# EAGLE board SIM900-328 (EAGLE 6.5.0)
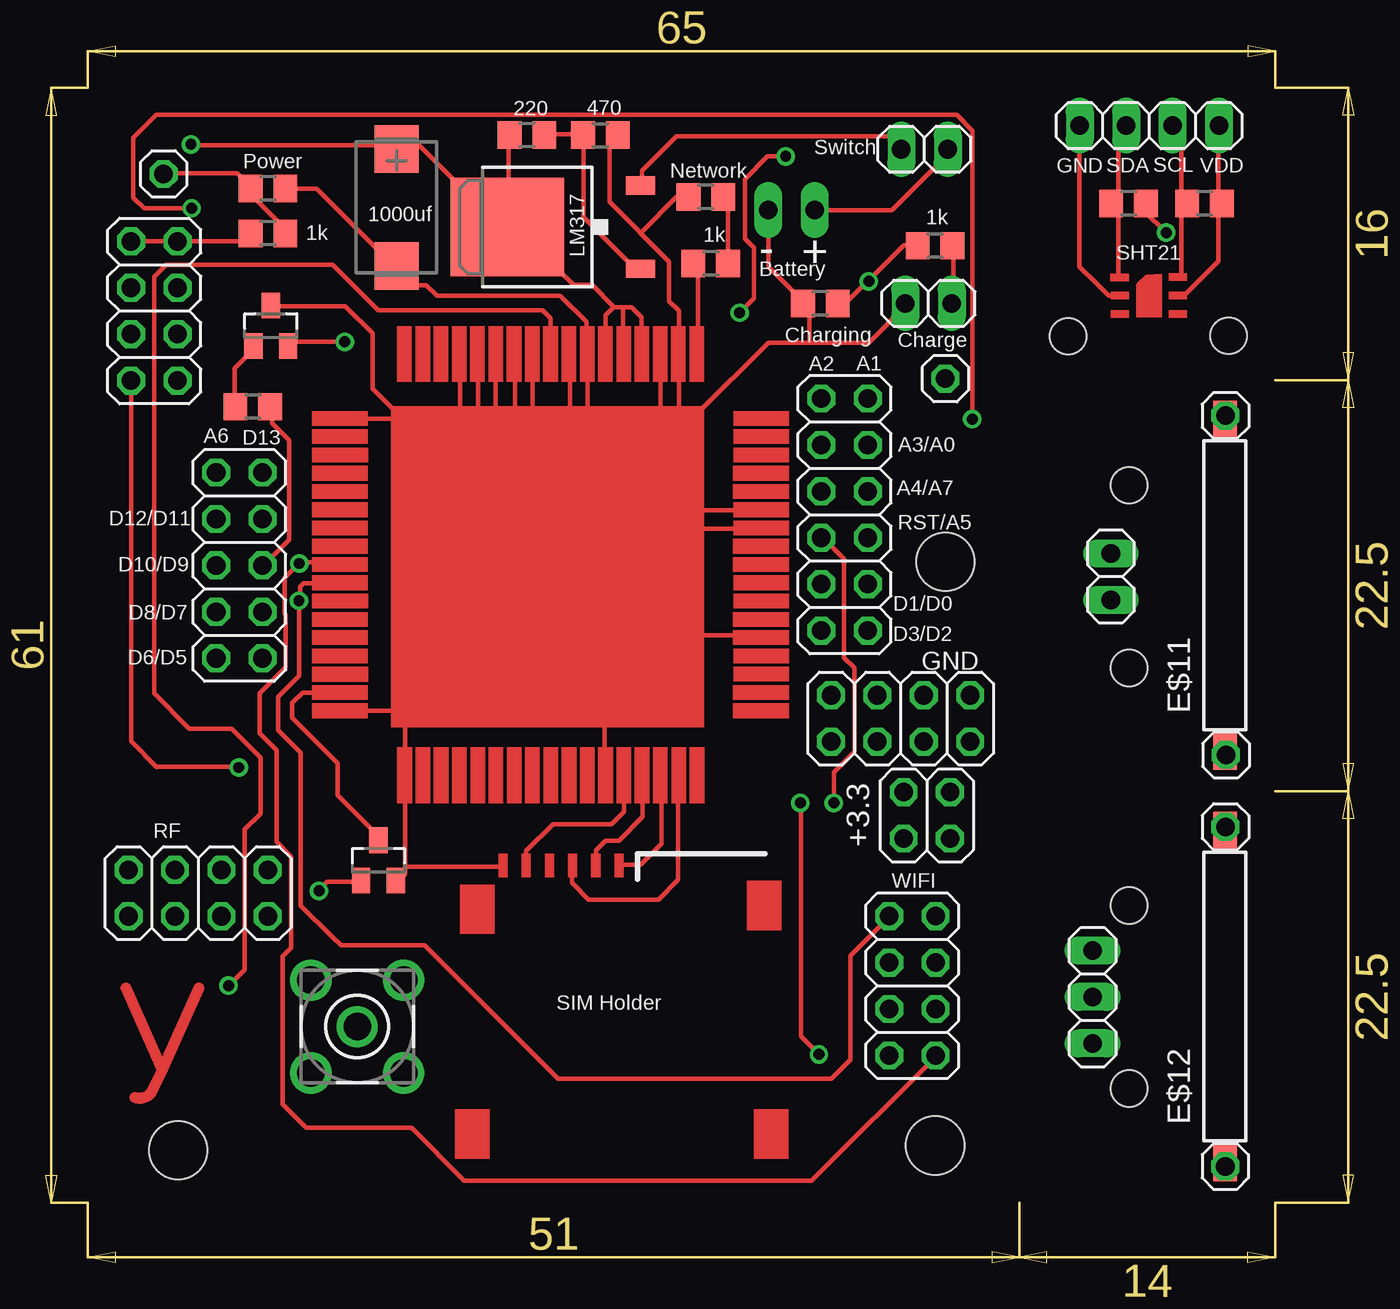
[diagram p0: board, top side]
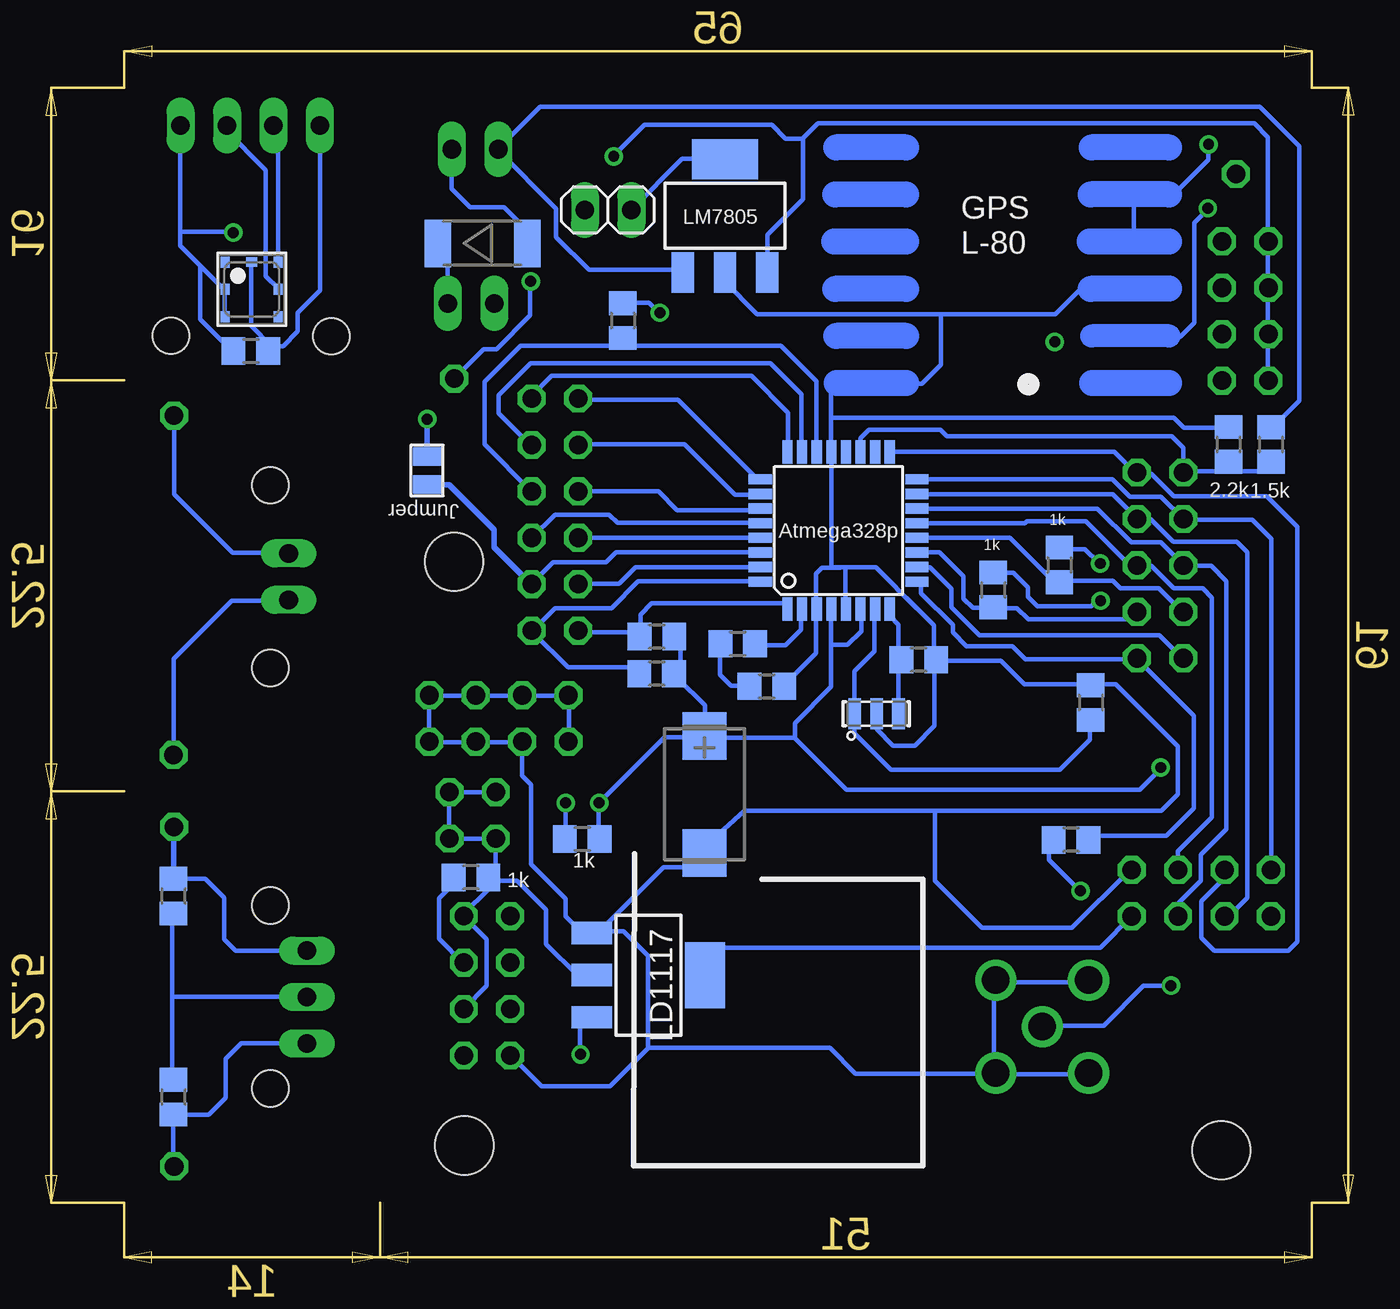
[diagram p1: board, bottom side, seen from below]

Size 71.6 x 66.6 mm. Coordinates in mm from the lower left corner, seen from the top.
Copper layers (1*16): Top 0.035mm / dielectric 1.5mm / Bottom 0.035mm
Design rules "default": minimum track width 10mil, minimum drill 24mil, track to track 8mil, track to pad 8mil, pad to pad 8mil, via to via 8mil, smd to smd 8mil, copper to edge 40mil, drill to drill 8mil, minimum pad ring 10mil, minimum via ring 8mil, stop-mask expansion 4mil, vias tented up to drill 0mil, thermal gap 10mil
Holes 3.2 mm at 7.25,6.16 49.25,38.36 48.69,6.43
Holes 2 mm at 55.97,50.7 64.75,50.73 59.3,42.55 59.3,32.55 59.3,19.55 59.3,9.55

## Footprints (pad centres in the part's own frame; a part is rotated, then mirrored left to right if it is on the bottom)
2X02 = drill 1.016 octagon: 1 -1.27,-1.27; 2 -1.27,1.27; 3 1.27,-1.27; 4 1.27,1.27
TQFP32-08 = smd 1.27 x 0.559: 1 -4.293,2.8; 2 -4.293,2; 3 -4.293,1.2; 4 -4.293,0.4; 5 -4.293,-0.4; 6 -4.293,-1.2; 7 -4.293,-2; 8 -4.293,-2.8; 17 4.293,-2.8; 18 4.293,-2; 19 4.293,-1.2; 20 4.293,-0.4; 21 4.293,0.4; 22 4.293,1.2; 23 4.293,2; 24 4.293,2.8 | smd 0.559 x 1.27: 9 -2.8,-4.293; 10 -2,-4.293; 11 -1.2,-4.293; 12 -0.4,-4.293; 13 0.4,-4.293; 14 1.2,-4.293; 15 2,-4.293; 16 2.8,-4.293; 25 2.8,4.293; 26 2,4.293; 27 1.2,4.293; 28 0.4,4.293; 29 -0.4,4.293; 30 -1.2,4.293; 31 -2,4.293; 32 -2.8,4.293
R0805 = smd 1.3 x 1.5: 1 -0.95,0; 2 0.95,0
1X02 = drill 1.016 long: 1 -1.27,0; 2 1.27,0
1X01 = drill 1.016 octagon: 1 0,0
CT7343 = smd 2.6 x 2.4: + -3.2,0; - 3.2,0
MELF-MLL41 = smd 1.45 x 2.6: 1 -2.445,0; 2 2.445,0
JUMP-2 = smd 1.016 x 1.524: 1 -0.762,0; 2 0.762,0
BMP180 = smd 0.6 x 0.5: 1 1.5,1.45; 2 0,1.45; 3 -1.5,1.45; 4 -1.5,-1.45; 5 0,-1.45; 6 1.5,-1.45 | smd 0.5 x 0.6: 7 1.5,0
2X04 = drill 1.016 octagon: 1 -3.81,-1.27; 2 -3.81,1.27; 3 -1.27,-1.27; 4 -1.27,1.27; 5 1.27,-1.27; 6 1.27,1.27; 7 3.81,-1.27; 8 3.81,1.27
X3-SMD-3.6X1.3X0.8MM = smd 0.7 x 1.7: 1 -1.2,0; 2 0,0; 3 1.2,0
SOT23 = smd 1 x 1.4: 1 -0.95,-1.1; 2 0.95,-1.1; 3 0,1.1
LTI-SASF54GT = drill 1.5 pad 2.2: 1 0,0; 2 -2.54,2.54; 3 2.54,2.54; 4 2.54,-2.54; 5 -2.54,-2.54
MK15 = smd 2 x 1.3: 1 -9.1,0; 2 9.1,0
1X03 = drill 1.016 long: 1 -2.54,0; 2 0,0; 3 2.54,0
1X04 = drill 1.016 long: 1 -3.81,0; 2 -1.27,0; 3 1.27,0; 4 3.81,0
2X05 = drill 1.016 octagon: 1 -5.08,-1.27; 2 -5.08,1.27; 3 -2.54,-1.27; 4 -2.54,1.27; 5 0,-1.27; 6 0,1.27; 7 2.54,-1.27; 8 2.54,1.27; 9 5.08,-1.27; 10 5.08,1.27
2X06 = drill 1.016 octagon: 1 -6.35,-1.27; 2 -6.35,1.27; 3 -3.81,-1.27; 4 -3.81,1.27; 5 -1.27,-1.27; 6 -1.27,1.27; 7 1.27,-1.27; 8 1.27,1.27; 9 3.81,-1.27; 10 3.81,1.27; 11 6.35,-1.27; 12 6.35,1.27
SOT223 = smd 1.219 x 2.235: 1 -2.311,-3.099; 2 0,-3.099; 3 2.311,-3.099 | smd 3.6 x 2.2: 4 0,3.099
TO252 = smd 1 x 1.6: 1 -2.28,-4.8; 2 2.28,-4.8 | smd 5.4 x 6.2: 3 0,2.5

## Placement (x,y rotation side)
+3.3  [2X02]  48.23,24.49 0 top
ATMEGA  [TQFP32-08]  28.2,40.07 90 bottom
CAP1  [R0805]  14.4,30.65 270 bottom
CAP2  [R0805]  63.42,57.97 180 top
CAP3  [R0805]  59.26,57.96 180 top
CAP4  [R0805]  23.82,33 180 bottom
CAP5  [R0805]  60.37,49.89 180 bottom
CAP7  [R0805]  64.6,20.07 90 bottom
CAP8  [R0805]  64.6,9.07 90 bottom
CHARGE  [1X02]  48.32,52.51 180 top
CHRGLED  [1X01]  49.24,48.39 0 top
E$1  [CT7343]  35.54,25.64 270 bottom
E$2  [CT7343]  19.2,57.75 270 top
E$3  [MELF-MLL41]  47.69,55.79 0 bottom
E$4  [JUMP-2]  50.73,43.36 90 bottom
E$5  [BMP180]  60.32,53.26 90 bottom
E$6  [2X04]  46.79,29.79 0 top
E$7  [X3-SMD-3.6X1.3X0.8MM]  26.12,30.04 0 bottom
E$8  [SOT23]  18.21,22.03 0 top
E$9  [SOT23]  12.32,51.28 0 top
E$10  [LTI-SASF54GT]  17.06,12.93 0 top
E$11  [MK15]  64.55,37.07 90 top
E$12  [MK15]  64.55,14.57 90 top
E$13  [1X03]  57.3,14.55 90 top
E$14  [1X04]  60.41,62.22 180 top
E$15  [2X04]  5.95,52.09 90 top
E$24  [R0805]  16.12,38.19 270 bottom
E$25  [R0805]  19.73,36.82 90 bottom
IO1  [2X05]  10.6,38.17 90 top
IO2  [2X06]  43.73,40.95 90 top
LD1117  [SOT223]  38.61,15.75 270 bottom
LED2  [R0805]  12.17,56.33 180 top
LED3  [R0805]  32.12,31.55 0 bottom
LED4  [R0805]  36.4,54.68 180 top
LED5  [R0805]  42.4,52.49 180 top
LED6  [R0805]  48.68,55.65 180 top
LM317  [TO252]  27.76,56.68 90 top
LM7805  [SOT223]  34.42,57.29 0 bottom
POWER  [1X02]  40.82,57.61 180 bottom
PWRLED  [1X01]  6.46,59.58 0 top
PWRLED1  [1X01]  64.57,46.36 0 top
PWRLED2  [1X01]  64.6,27.8 0 top
PWRLED3  [1X01]  64.57,23.86 0 top
PWRLED4  [1X01]  64.57,5.29 0 top
R1  [R0805]  40.01,51.56 270 bottom
R2  1k  [R0805]  12.17,58.78 180 top
R3  1k  [R0805]  48.32,21.1 180 bottom
R4  220  [R0805]  26.34,61.72 0 top
R5  470  [R0805]  30.37,61.71 0 top
R6  [R0805]  33.72,33.88 0 bottom
R7  [R0805]  42.24,23.19 180 bottom
R8  [R0805]  38.15,34.26 180 bottom
R9  [R0805]  38.16,32.24 180 bottom
R10  [R0805]  4.54,44.78 270 bottom
R11  [R0805]  6.86,44.78 270 bottom
R12  1k  [R0805]  36.14,58.32 180 top
R13  220  [R0805]  11.34,46.85 180 top
R15  [R0805]  15.48,23.15 180 bottom
RF  [2X04]  8.35,20.24 0 top
SWITCH1  [1X02]  58.3,37.55 270 top
SWITCH2  [1X02]  48.1,60.93 180 top
WIFI  [2X04]  47.44,15.16 90 top

## Library data of the parts
+3.3 CHARGE CHRGLED E$6 E$13-E$15 IO1 IO2 POWER PWRLED PWRLED1-PWRLED4 RF SWITCH1 SWITCH2 WIFI = pinhead
ATMEGA = Arduino-AVR
CAP1-CAP5 CAP7 CAP8 E$24 E$25 LED2-LED6 R1-R13 R15 = eagle-ltspice
E$1-E$3 LD1117 LM317 LM7805 = smd-ipc
E$4 = smd-special
E$5 = SparkFun-Sensors
E$7 = SMD-RESONATOR-16MHZ-15PF-0.5_-40R_3P-3.2X1.3MM_
E$8 E$9 = linear
E$10 = con-coax
E$11 E$12 = switch-reed

## Tracks (layer width: path | path; a pad name or v marks a point on that pad's centre or on a via)
S$1
  Top 0.254: 28.81,21.64 28.81,20.79 29.72,19.88 33.53,19.88 34.61,20.96 34.61,26.55
S$2
  Top 0.254: 33.7,25.89 33.7,22.94 32.56,21.8 31.41,21.8
S$3
  Top 0.254: 13.92,36.36 13.92,36.99 14.12,37.19 16.26,37.19
S$4
  Top 0.254: 13.95,27.91 13.95,19.55 15.67,17.84 16.17,17.39 18.89,17.37 20.74,17.37 28.03,10.08 43,10.08 44.05,11.12 44.05,16.8 46.15,18.9
S$5
  Bottom 0.254: 41.83,18.15 39.98,18.15 38.63,16.79 38.63,11.75 40.72,9.66 44.45,9.66 46.11,11.32
S$6
  Bottom 0.305: 35.63,15.37 35.63,16.32
S$7
  Bottom 0.254: 23.92,42.86 13.21,42.86 12.27,41.92 10.56,41.92 9.32,40.68
S$8
  Bottom 0.254: 26.99,44.44 26.99,45.13 26.54,45.59 22.64,45.59 22.28,45.23 9.96,45.23
S$9
  Bottom 0.254: 23.98,41.27 14.03,41.27 12.18,39.42 10.55,39.42 9.35,38.22
S$10
  Bottom 0.254: 11.86,40.72 13.19,42.06 23.98,42.06
S$11
  Bottom 0.254: 61.81,53.22 64.25,55.66 64.25,62.18
S$12
  Bottom 0.254: 10.5,27.09 11.72,25.88 27.76,25.88 30.61,28.73 35.68,28.73
S$13
  Bottom 0.254: 9.86,46.24 28.09,46.24
S$14
  Bottom 0.254: 25.42,44.37 13.11,44.37 11.93,43.19
S$15
  Bottom 0.254: 11.89,43.17 11.07,43.17 9.86,41.96 4.78,41.96 3.1,40.28 3.1,17.57 3.59,17.07 7.64,17.07 8.35,17.79 8.35,19.79 7.09,21.05 7.09,21.55 7.1,21.56
S$16
  Bottom 0.254: 9.35,40.66 5.54,40.66 4.51,39.63 4.51,21.44
S$17
  Bottom 0.254: 9.33,43.23 9.33,44.59 9.96,45.23
S$18
  Bottom 0.254: 41.79,18.28 42.51,18.28
S$19
  Bottom 0.254: 42.41,17.98 42.41,18.22 43.16,18.97 43.16,19.94 45.05,21.82 45.05,26.18 45.52,26.64 45.52,28.48 50.62,28.48 50.62,31.04 42.96,31.04 42.96,28.52
S$20
  Top 0.254: 42.52,39.7 43.71,38.52 43.71,33.12 44.27,32.56 44.27,27.96 43.15,26.84 43.15,25.17
S$21
  Bottom 0.254: 11.77,40.69 11.11,40.69 9.89,39.47 6.4,39.47 5.82,38.89 5.82,19.99 6.9,18.91
S$22
  Bottom 0.254: 11.9,38.13 11.08,38.13 9.86,36.91 8.27,36.91 7.76,36.4 7.76,24.39 9.63,22.52 9.63,21.48
S$23
  Bottom 0.254: 9.61,18.97 9.61,19.68 8.36,20.92 8.36,22.35 6.97,23.74 6.97,37.3 7.81,38.14 9.35,38.14
S$24
  Bottom 0.254: 24.84,32.9 24.84,32.36
S$25
  Bottom 0.254: 12.93,53.43 14.81,53.43 16.33,51.91
S$26
  Bottom 0.254: 14.96,20.35 16.68,22.07 16.68,23.09
S$27
  Top 0.254: 32.68,25.98 32.68,24.4 31.38,23.11 30.64,23.11 30.12,22.58 30.12,21.48
S$28
  Bottom 0.254: 48.72,16.38 50.07,17.73 50.07,19.96 49.27,20.76
S$29
  Bottom 0.254: 58.88,54.75 58.88,62.54
S$30
  Bottom 0.254: 42.41,34.49 39.17,34.49
S$31
  Bottom 0.254: 38.79,32.59 43.02,32.59 44.94,34.51
S$32
  Bottom 0.254: 36.86,34.37 36.86,32.43
S$33
  Top 0.254: 27.88,61.76 29.22,61.76
S$34
  Top 0.254: 35.6,46.35 35.6,46.4 39.55,50.35 39.94,50.35
S$35
  Top 0.254: 29.44,61.62 29.44,57.22 32.3,54.36
S$36
  Top 0.254: 34.13,54.78 30.86,58.05 30.86,61.71
S$37  (via drill 0.6)
  other vias: 7.95,61.2
S$38
  Bottom 0.254: 9.31,43.31 4.2,43.31
S$39
  Bottom 0.254: 5.45,62.35 8.64,62.35
S$40
  Bottom 0.254: 6.92,45.68 9.3,45.68 9.86,46.24
S$41
  Bottom 0.254: 32.09,54.26 32.09,56.26 30.16,58.2 30.16,61.53 29.34,62.35
S$42
  Bottom 0.254: 36.18,22.21 33.34,24.73 10.54,24.73 9.63,25.64 9.63,28.27 13.02,31.66 18.03,31.66
S$43
  Bottom 0.254: 12.29,21.47 15.43,18.33 20.37,18.33 22.93,20.9 22.93,24.68
S$44
  Bottom 0.254: 41.56,15.73 42.5,15.73 44.2,17.43 44.2,19.32 45.79,20.91 47.36,20.91 47.36,20.46 48.73,19.1
S$45
  Top 0.254: 35.69,49.36 35.69,54.75
S$46
  Top 0.254: 27.66,49.55 27.66,51.02
S$47
  Top 0.254: 37.34,54.72 37.34,58.44
S$48
  Top 0.254: 25.35,61.82 25.35,58.01
S$49
  Bottom 0.254: 22.88,32.95 19.33,32.95 18.03,31.66
S$50
  Top 0.254: 32.64,59.05 32.64,59.76 34.54,61.66 46.95,61.66
S$51
  Top 0.254: 42.04,57.59 46.31,57.59 49.53,60.81
S$52
  Top 0.254: 6.47,59.62 10.49,59.62 11.22,58.9
S$53
  Top 0.254: 6.09,27.13 4.68,28.54 4.68,48.12
S$54
  Top 0.254: 47.1,52.4 45.05,50.35 39.57,50.35
S$55
  Top 0.254: 49.68,52.44 49.68,55.48
S$56
  Bottom 0.254: 11.9,38.11 12.2,38.11 14.66,40.57 17.89,40.57 18,40.46 24.19,40.46
S$57
  Bottom 0.254: 7.95,61.19 7.95,60.36 10.07,58.24
S$58
  Top 0.254: 10.9,58.45 11.25,58.45 13.11,56.59
S$59
  Top 0.305: 18.73,54.39 19.79,54.39
S$60
  Top 0.254: 7.98,61.14 18.6,61.14
S$61
  Top 0.254: 13.85,38.26 13.07,37.48 13.07,35.53 13.14,35.46 13.14,32.6 11.71,31.17 11.71,28.97 12.64,28.05 12.64,23.04 13.45,22.23 13.45,17.25
S$62
  Top 0.254: 4.65,55.72 4.83,55.9 11.37,55.9
S$63
  Top 0.254: 27.64,50.3 27.64,51.69 27.21,52.12 18.21,52.12 15.71,54.63 6.59,54.63 5.93,53.97 5.93,31.16 7.87,29.23 10.18,29.23 11.76,27.65 11.76,24.58 10.9,23.72 10.9,16.05 10.03,15.17
S$64
  Top 0.254: 11.89,38.15 13.32,39.57 13.32,45.02 12.4,45.94 12.4,46.74
S$65
  Bottom 0.254: 4.72,48.15 4.72,55.78
S$66  (via drill 0.6)
  other vias: 16.37,50.39
S$67
  Bottom 0.254: 49.61,52.53 49.61,55.8
S$68
  Bottom 0.254: 14.54,15.35 19.69,15.35 19.69,10.34 14.58,10.34
S$69
  Bottom 0.254: 19.65,37.76 18.63,37.76 17.85,36.98 17.85,36.45 17.32,35.92 14.36,35.92 13.94,36.34
S$70
  Top 0.254: 50.73,46.14 50.73,61.95
S$71
  Top 0.254: 47.77,55.69 46.96,55.69 43.73,52.46
S$72
  Top 0.254: 41.79,52.22 41.79,50.37
S$73
  Top 0.254: 19.25,20.85 19.68,21.27 19.68,26.15
S$74
  Top 0.254: 25,21.69 19.73,21.69
S$75
  Bottom 0.254: 4.7,55.68 4.7,61.59 5.45,62.35
S$76
  Top 0.254: 31.64,25.84 31.64,24.69 30.97,24.01 27.76,24.01 26.29,22.54 26.29,21.54
S$77
  Top 0.254: 35.05,29.57 34.78,29.84
S$78  (via drill 0.6)
  other vias: 42.32,11.41
S$79
  Bottom 0.254: 46.96,23.18 46.96,20.63
S$80
  Bottom 0.254: 46.96,23.21 49.52,23.21 49.52,25.74 46.96,25.74
S$81  (via drill 0.6)
  other vias: 13.86,36.23
S$82
  Bottom 0.254: 11.82,35.58 12.19,35.21 17.81,35.21 18.43,35.83 19.82,35.83
S$83  (via drill 0.6)
  other vias: 10.57,27.11
S$84
  Bottom 0.254: 12.13,50.69 9.49,50.69 8.74,51.43 8.74,56.91 8.13,57.53
S$85  (via drill 0.6)
  other vias: 7.99,57.71
S$86
  Top 0.254: 7.41,62.81 6.05,62.81
S$87
  Top 0.254: 57.58,53.51 56.59,54.5 56.59,62.22
S$88
  Bottom 0.254: 28.6,35.8 28.61,35.79 28.61,31.51 30.6,29.52 30.6,28.72
S$89
  Bottom 0.254: 30.26,35.75 30.26,34.65 31.11,33.8 32.85,33.8
S$90
  Top 0.254: 13.12,58.78 14.82,58.78 19.21,54.4
S$91
  Bottom 0.254: 58.89,53.32 59.55,53.98 59.55,59.8 61.78,62.03
S$92  (via drill 0.6)
  other vias: 45.06,53.7
S$93
  Top 0.254: 35.24,58.35 34.56,58.35 32.58,56.37
S$94
  Top 0.254: 9.8,62.81 7.44,62.81
S$95
  Bottom 0.254: 39.54,57.63 36.77,60.4 32.82,60.4
S$96  (via drill 0.6)
  other vias: 40.51,60.54
S$97
  Bottom 0.254: 61.8,51.68 61.8,53.37
S$98  (via drill 0.6)
  other vias: 41.3,25.17
S$99
  Bottom 0.254: 24.09,38.89 22.7,38.89 21.37,37.56 21.37,36.34 20.86,35.84 19.66,35.84
S$100
  Top 0.254: 7.59,62.81 7.39,62.81
S$101
  Top 0.254: 13.93,38.35 16.29,38.35
S$102
  Top 0.254: 62.29,52.93 64.18,54.82 64.18,62.29
S$103
  Top 0.254: 58.71,53.94 58.71,61.79 59.12,62.2
S$104
  Bottom 0.254: 4.31,45.82 2.97,47.16 2.97,61.1 5.14,63.26 44.53,63.26 46.83,60.96
S$105
  Top 0.254: 58.91,52.92 58.2,52.92 57.59,53.53
S$106
  Top 0.254: 62.16,53.94 62.16,61.68 61.65,62.19
S$107
  Bottom 0.254: 31,36.1 38.43,36.1 39.05,35.47 39.05,34.12
S$108  (via drill 0.6)
  other vias: 61.33,56.37
S$109
  Bottom 0.254: 61.32,56.31 61.44,56.43 64.23,56.43
S$110
  Bottom 0.254: 9.34,35.57 10.67,36.9 12.78,36.9 13.2,37.32 16.16,37.32
S$111
  Top 0.254: 61.33,56.35 60.14,57.54 60.14,58.32
S$112
  Top 0.254: 59.96,52.9 59.83,53.03 59.83,53.53 60.26,53.97 60.82,53.97
S$113
  Bottom 0.254: 36.18,21.65 37.79,21.65 41.04,18.41
S$114
  Bottom 0.254: 17.03,13.05 17.09,13
S$115
  Bottom 0.254: 35.52,28.77 37.74,28.77 41.34,25.16
S$116
  Top 0.254: 41.33,25.2 41.33,12.41 42.35,11.4
S$117
  Bottom 0.254: 42.34,11.57 42.34,13.68
S$118
  Bottom 0.254: 45.37,55.81 45.37,56.62 46.5,57.75 48.38,57.75 49.39,58.77 49.39,60.9
S$119
  Bottom 0.254: 46.88,60.9 43.66,57.68 43.66,56.13 41.86,54.33 36.86,54.33
S$120
  Top 0.254: 10.35,46.81 10.35,48.95 11.42,50.02
S$121
  Bottom 0.254: 16.09,26.99 14.46,28.62 14.46,29.7
S$122
  Top 0.254: 12.33,52.35 16.4,52.35 17.89,50.86 17.89,47.83 19.25,46.48
S$123
  Bottom 0.254: 19.68,10.36 27.28,10.36 28.69,11.77 38.59,11.77
S$124  (via drill 0.6)
  other vias: 43.13,25.17
S$125
  Bottom 0.254: 43.14,25.06 43.14,23.13
S$126
  Bottom 0.254: 41.33,25.14 41.33,23.2
S$127
  Bottom 0.254: 35.52,28.95 35.52,30.51 36.99,31.98
S$128
  Bottom 0.254: 29.43,35.62 29.43,33.37 31.03,31.77
S$129
  Bottom 0.254: 34.47,54.17 34.47,53.73 32.66,51.91 22.62,51.91
S$130
  Bottom 0.254: 31.35,50.18 29.4,48.23 29.4,44.34
S$131
  Bottom 0.254: 45.61,50.18 31.35,50.18
S$132
  Bottom 0.254: 45.08,44.76 46.81,46.49 46.81,47.48 45.06,49.24 44.31,49.24
S$133
  Bottom 0.254: 45.02,42.22 47.58,44.78 47.58,48.21 45.61,50.18
S$134
  Bottom 0.254: 45.09,53.54 45.09,51.84 46.93,50 47.63,50 49.25,48.38
S$135
  Bottom 0.254: 22.98,33.03 22.98,34.88 24.49,36.4
S$136
  Bottom 0.254: 11.91,33.04 17.99,33.04 18.7,33.75 21.19,33.75 21.95,34.51 21.95,34.91 23.69,36.65 23.69,37.31
S$137
  Bottom 0.254: 9.36,33.06 10.65,34.35 20.5,34.35 22.03,35.89 22.03,36.9 23.19,38.05 24.16,38.05
S$138
  Bottom 0.254: 24.13,39.68 18.83,39.68 16.47,37.32
S$139
  Bottom 0.254: 13.97,38.31 14.72,39.06 16.29,39.06
S$140
  Top 0.254: 8.01,57.71 5.39,57.71 4.8,58.29 4.8,61.57 6.04,62.81
S$141
  Top 0.305: 31.64,26.56 31.64,25.38
S$142
  Top 0.254: 30.65,50.46 30.65,51.85 31.09,52.29 32.06,52.29 32.62,51.73 32.62,50.02
S$143
  Top 0.254: 10.09,27.13 10.59,27.14 6.08,27.14
S$144
  Top 0.254: 13.29,50.12 13.56,50.39 16.39,50.39
S$145
  Bottom 0.254: 26.23,35.75 26.23,33.46 27.32,32.36 27.32,28.97 25.34,26.99 16.11,26.99
S$146
  Bottom 0.254: 24.92,30.03 24.92,34.93 25.39,35.4
S$147
  Bottom 0.254: 40.56,60.54 38.83,62.27 31.86,62.27 31.11,61.52 30.18,61.52
S$148
  Bottom 0.254: 22.96,33.1 22.96,29.38 24.04,28.3 25.22,28.3 26.12,29.2 26.12,29.93
S$149
  Bottom 0.305: 44.98,37.08 47.05,39.16 47.05,40.11 49.51,42.57 50.83,42.57
S$150  (via drill 0.6)
  other vias: 14.96,20.35
S$151
  Bottom 0.254: 63.14,54.52 63.14,51.62 61.43,49.91
S$152
  Bottom 0.254: 60.35,54.81 60.35,51.26 59.26,50.17 58.6,50.17 57.8,50.97 57.8,51.98 56.58,53.21 56.58,62.14
S$153  (via drill 0.6)
  other vias: 50.72,46.17
S$154
  Bottom 0.305: 50.73,46.13 50.73,44.22
S$155
  Top 0.254: 15.91,31.19 14.06,31.19 13.5,30.64 13.5,29.82 15.99,27.34 15.99,25.59 18.07,23.5
S$156
  Top 0.254: 13.88,36.23 13.88,32.13 12.71,30.97 12.71,29.16 13.95,27.91
S$157
  Top 0.254: 16.17,46.18 20.14,46.18
S$158  (via drill 0.6)
  other vias: 37.98,51.99
S$159
  Bottom 0.254: 37.98,51.94 38.57,52.53 40.11,52.53
S$160
  Bottom 0.254: 11.89,33.07 8.76,29.94 8.76,24.87 10.27,23.36 15.08,23.36
S$161
  Top 0.254: 26.41,54.32 28.07,54.32 28.88,53.51 29.9,53.51 31.11,52.29
S$162
  Top 0.254: 39.57,57.6 39.57,54.52 41.38,52.71
S$163
  Top 0.254: 31.61,50.58 31.61,52.25
S$164
  Top 0.254: 38.02,52.05 38.76,52.79 38.76,55.54 38.26,56.04 38.26,59.3 39.52,60.55 40.54,60.55
S$165
  Top 0.254: 48.82,11.4 41.92,4.49 22.91,4.49 20.03,7.38 14.26,7.38 12.97,8.67 12.97,16.78 13.45,17.25
S$166
  Bottom 0.254: 10,15.15 11.52,15.15 13.69,12.98 17.12,12.98
S$168
  Bottom 0.305: 64.64,21.02 64.6,21.05 64.6,23.88 64.57,23.91
S$169
  Bottom 0.254: 64.62,4.87 64.62,8.22
S$170
  Bottom 0.254: 58.33,38.84 61.36,38.84 64.58,42.06 64.58,46.83
S$171
  Bottom 0.254: 58.3,36.24 61.42,36.24 64.59,33.07 64.59,27.62
S$172
  Bottom 0.254: 64.67,19.07 64.67,9.93
S$173
  Bottom 0.254: 57.32,12.02 60.9,12.02 61.76,11.16 61.76,9.04 62.69,8.11 64.66,8.11
S$174
  Top 0.61: 4.39,15.04 6.39,10.54 | 6.39,10.54 8.39,15.04 | 6.39,10.54 5.89,9.54 arc-90 4.89,9.04
S$175  (via drill 0.6)
  other vias: 13.88,38.27
S$177
  Bottom 0.254: 57.32,17.07 61.2,17.07 61.83,17.7 61.83,19.97 62.87,21.01 64.67,21.01
S$178
  Bottom 0.254: 16.33,51.91 23.26,51.91
S$179
  Top 0.254: 14.93,20.37 15.42,20.86 17.42,20.86
S$180
  Top 0.254: 27.72,49.9 27.66,49.97
S$181  (via drill 0.6)
  other vias: 10.01,15.17
S$182
  Bottom 0.305: 64.6,19.29 64.64,19.26 64.67,19.26
S$183
  Bottom 0.254: 57.33,14.55 64.63,14.55
S$184
  Bottom 0.254: 35.54,28.87 35.54,28.9
S$185
  Bottom 0.254: 34.7,33.71 34.7,32.18 34.1,31.58 32.99,31.58
S$188
  Top 0.254: 34.65,49.7 34.65,52.1 34.13,52.63 34.13,54.78
S$189
  Top 0.254: 19.06,61.22 20.35,61.22 22.51,59.06
S$190
  Top 0.254: 19.2,53.5 20.83,53.5 21.41,52.92 28.17,52.92 29.6,51.49 29.6,50.47
S$191
  Bottom 0.254: 10.64,55.79 10.6,55.75
S$192
  Bottom 0.254: 12.14,18.98 13.87,17.25 35.58,17.25
S$193
  Top 0.254: 22.7,45.89 22.7,49.23
S$194
  Top 0.254: 23.66,45.83 23.66,49.17
S$195
  Top 0.254: 24.63,45.54 24.63,48.88
S$196
  Top 0.254: 26.64,46.26 26.64,49.6
S$197
  Top 0.254: 28.69,46.19 28.69,49.68
S$198
  Top 0.254: 33.65,46.23 33.65,49.42
S$199
  Top 0.254: 34.08,40.16 39.39,40.16
S$243
  Top 0.254: 25.68,46.18 25.68,49.52
S$244
  Bottom 0.254: 29.45,35.8 29.45,37.7 29.12,38.03 28.1,38.03 27.84,38.06 27.84,35.71 27.82,35.7
S$247
  Bottom 0.254: 28.6,44.25 28.6,38.03
S$248
  Bottom 0.254: 28.58,35.68 28.63,35.73
S$249
  Bottom 1.422: 10.11,61.04 14.35,61.04
S$250
  Bottom 1.422: 10.11,58.46 14.41,58.46
S$251
  Bottom 1.422: 10.11,55.88 14.46,55.88
S$252
  Bottom 1.422: 10.11,53.3 14.41,53.3
S$253
  Bottom 1.27: 10.11,50.72 14.34,50.72
S$254
  Bottom 1.422: 10.11,48.14 14.32,48.14
S$255
  Bottom 1.422: 24.51,61.04 28.34,61.04
S$256
  Bottom 1.422: 24.51,58.46 28.39,58.46
S$257
  Bottom 1.422: 24.51,55.88 28.45,55.88
S$258
  Bottom 1.422: 24.51,53.3 28.39,53.3
S$259
  Bottom 1.422: 24.51,50.72 28.33,50.72
S$260
  Bottom 1.422: 24.51,48.14 28.3,48.14
S$261
  Bottom 0.254: 23.9,35.8 26.16,38.07 28.59,38.07
S$263
  Top 0.254: 29.66,46.17 29.66,49.66
S$264
  Top 0.254: 39.27,39.14 39.48,39.34
S$265
  Top 0.254: 39.29,38.33 39.6,38.02
S$266
  Top 0.254: 34.66,46.32 34.66,49.51
S$267
  Top 0.254: 19.68,29.69 19.68,27.39
S$268
  Top 0.254: 19.52,30.23 16.65,30.23
S$269
  Top 0.254: 30.6,29.92 30.6,27.05
S$277
  Top 0.254: 34.68,34.33 38.96,34.33
S$278
  Top 0.254: 34.01,41.18 39.32,41.18
S$282
  Bottom 0.254: 27.09,53.3 27.1,53.28
S$285
  Bottom 0.254: 27.52,50.75 27.08,50.66
S$288
  Bottom 0.254: 27.29,50.68 27.35,50.73
S$289
  Bottom 0.254: 26.34,53.2 26.31,53.22
S$291
  Bottom 0.254: 11.6,53.21 11.6,53.22
S$293
  Bottom 0.254: 26.5,48.12 26.49,48.14
S$295
  Bottom 0.254: 27.36,48.12 27.35,48.13
S$297
  Bottom 0.254: 12.04,58.44 12.04,55.82 12.06,55.81
S$298
  Bottom 0.254: 12.39,55.86
S$299
  Bottom 0.254: 26.51,48.07 24.4,48.07
S$304
  Bottom 0.254: 28.61,44.4 28.61,48.14
S$307
  Bottom 0.254: 25.05,48.11 23.64,48.11 22.61,49.15 22.61,51.83
S$308
  Bottom 0.254: 44.44,49.24 31.94,49.24 30.23,47.53 30.23,44.4
S$309
  Bottom 0.254: 30.96,44.34 30.96,46.52 32.97,48.53 43.9,48.53 45.08,47.35
S$310
  Bottom 0.254: 32.58,42.83 36.98,47.23 42.43,47.23
S$311
  Bottom 0.254: 32.64,42.04 33.88,42.04 36.62,44.78 42.34,44.78
S$312
  Bottom 0.254: 32.32,41.18 37.04,41.18 38.07,42.21 42.48,42.21
S$313
  Bottom 0.254: 32.43,40.49 40.29,40.49 40.75,40.95 43.72,40.95 45.02,39.65
S$314
  Bottom 0.254: 32.43,39.68 42.56,39.68
S$330
  Bottom 0.254: 26.96,35.65 26.96,34.56 27.7,33.81 28.57,33.81
S$345
  Bottom 0.254: 32.47,38.88 40.39,38.88 40.92,38.35 43.83,38.35 45.01,37.16
S$346
  Bottom 0.254: 32.45,38.06 39.32,38.06 40.23,37.15 42.39,37.15
S$347
  Bottom 0.254: 32.51,37.29 39.17,37.29 40.64,35.82 43.72,35.82 45.01,34.53
S$351
  Bottom 0.254: 11.91,55.9 11.92,55.89
S$367
  Bottom 0.254: 29.34,62.35 8.49,62.35
S$390
  Bottom 0.254: 21.25,46.24 28.58,46.24
S$391
  Top 0.254: 50.73,61.95 49.87,62.81 9.71,62.81
S$409
  Bottom 0.254: 48.7,13.91 47.45,15.16 47.45,17.7 48.7,18.95
(copper drawn outside any net)
  shapes: Top area x88

## Text on the board
tNames: 470 | 220 | Power | Switch | Network | GND | SDA | SCL | VDD | 1000uf | 1k | 1k | 1k | LM317 | SHT21 | - | Battery | + | Charging | Charge | A1 | A2 | A6 | D13 | A3/A0 | A4/A7 | D12/D11 | RST/A5 | D10/D9 | D8/D7 | D1/D0 | D3/D2 | D6/D5 | GND | SIM Holder
bNames: GPS / L-80 | 1.5k | 2.2k | Jumper | 1k | 1k | Atmega328p | 1k | 1k